# Altium PCB SIM7020.PcbDoc (part 3 of 3)
Units mm, origin at the board's own origin, x right, y up, seen from the top; angles counter-clockwise.
Board outline 43.87 x 60.4 mm, 2 copper layers (Top Layer, Bottom Layer); 78 components, 60 nets, 252 pads, 354 vias.
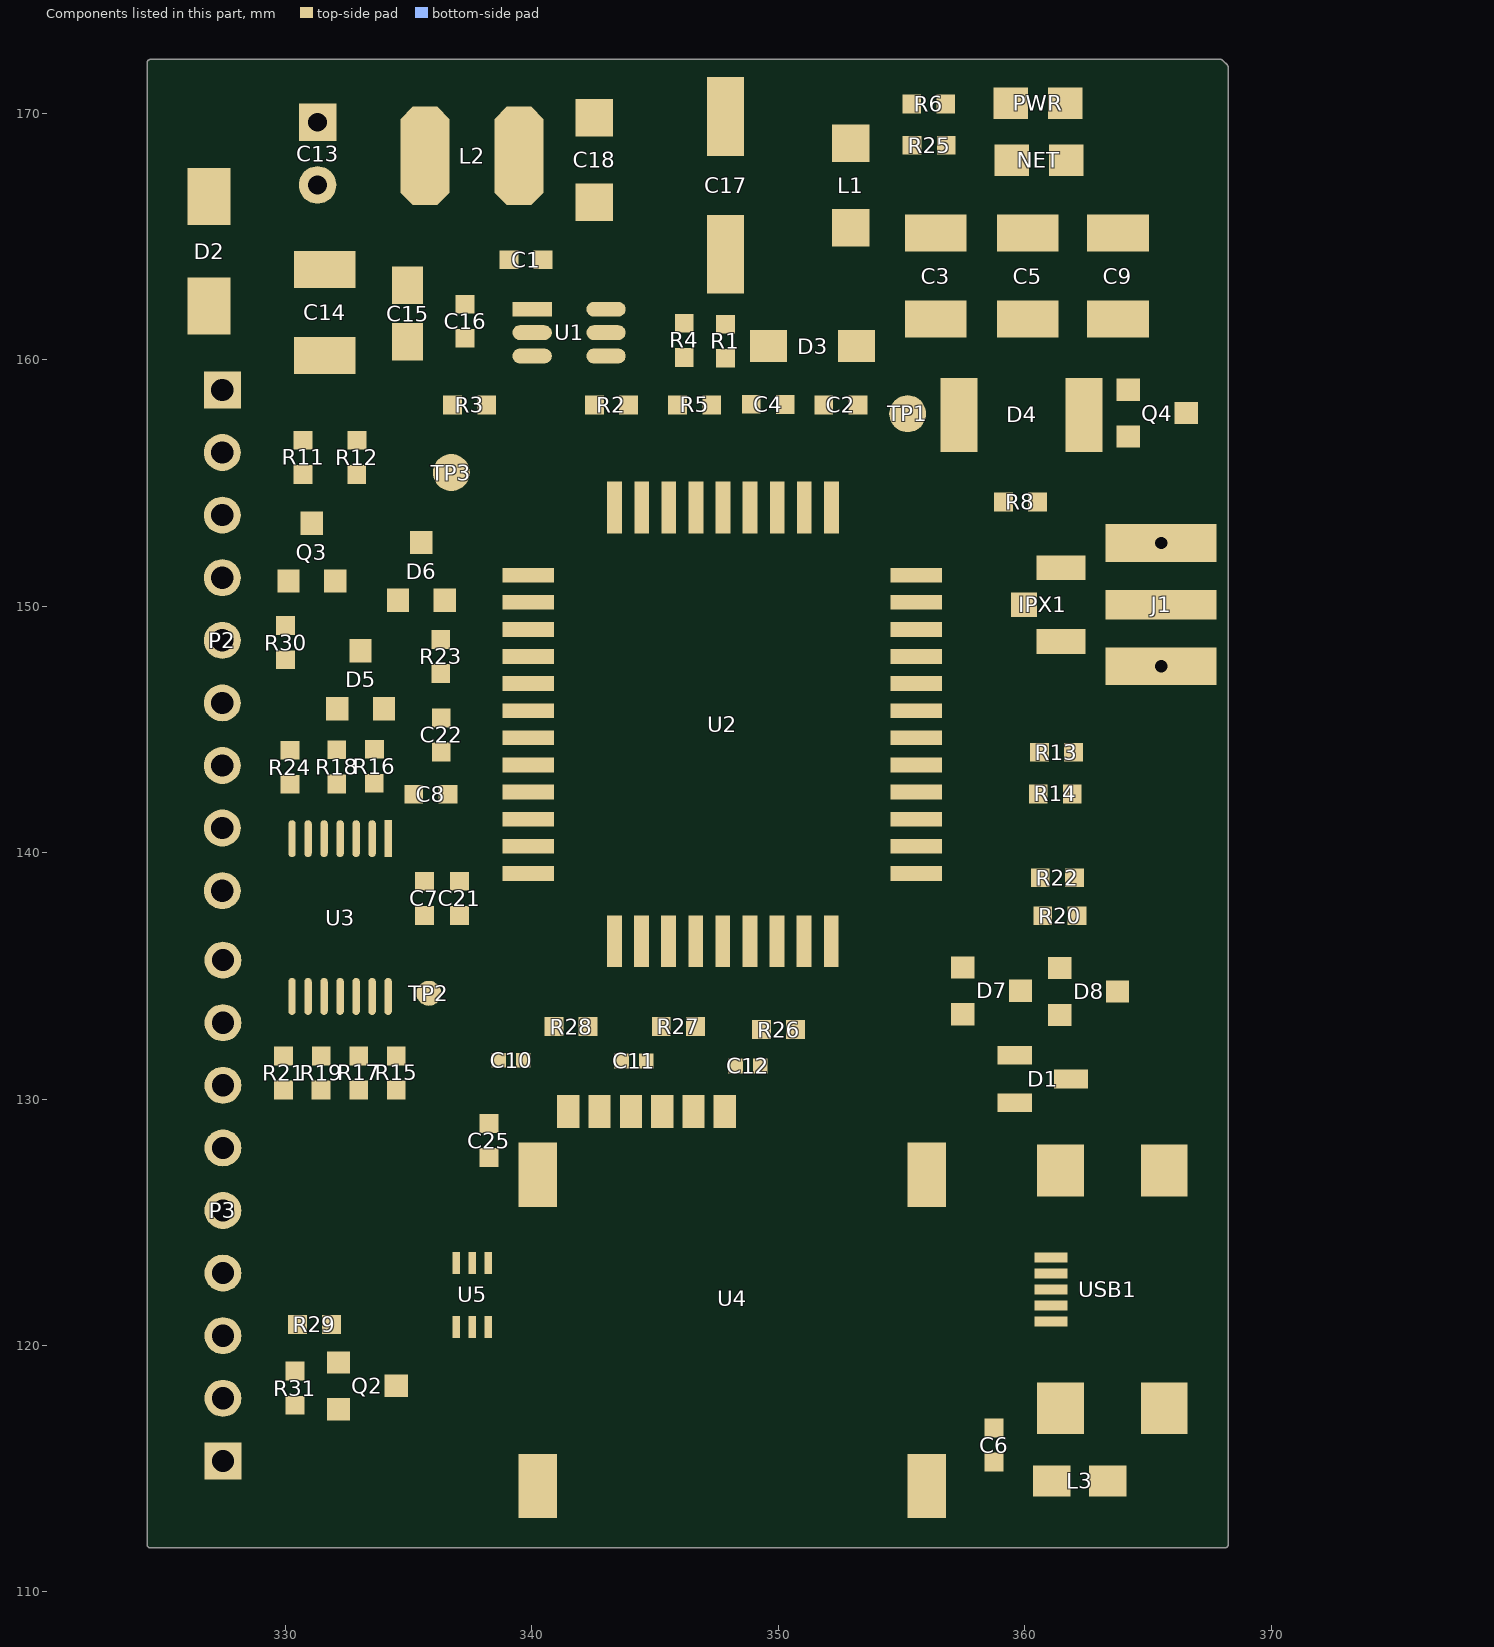
[diagram p3: the components of this part, seen from the top]

## Silkscreen, mask and mechanical layers (free items; w line width, h text height)
Top Overlay:
  lines w0.254: 321.716,172.11 324.104,172.11 ; 321.818,111.862 324.206,111.862 ; 322.075,113.386 322.58,111.862 ; 322.171,170.587 322.682,172.11 ; 322.326,111.862 322.834,111.861 ; 322.428,172.111 322.936,172.11 ; 322.615,132.439 322.58,111.862 ; 322.647,151.533 322.682,172.11 ; 323.091,113.385 322.58,111.862 ; 323.187,170.586 322.682,172.11 ; 324.46,110.134 324.46,111.608 ; 324.46,110.541 324.459,111.049 ; 325.982,111.306 324.46,110.795 ; 325.985,110.29 324.46,110.795 ; 336.883,110.824 324.46,110.795 ; 343.357,143.51 343.357,144.882 ; 355.724,110.868 368.148,110.896 ; 366.622,111.401 368.148,110.896 ; 366.625,110.385 368.148,110.896 ; 368.148,110.642 368.147,111.15
  text "VIN" at 325.882,158.648 h0.74 r90
  text "EN" at 325.882,156.566 h0.74 r90
  text "VEXT" at 325.933,153.264 h0.74 r90
  text "PKEY" at 325.933,150.063 h0.74 r90
  text "ADC" at 325.831,147.472 h0.74 r90
  text "P1" at 325.831,145.796 h0.74 r90
  text "RST" at 325.831,142.697 h0.74 r90
  text "DRT1" at 325.831,139.7 h0.74 r90
  text "P0" at 325.831,137.77 h0.74 r90
  text "RP0" at 325.831,134.874 h0.74 r90
  text "60.24889 (mm)" at 323.529,132.691 h1.52 r89.9
  text "EINT" at 325.831,131.826 h0.74 r90
  text "RX2" at 325.882,129.286 h0.74 r90
  text "TX2" at 325.933,126.848 h0.74 r90
  text "RX1" at 325.882,124.714 h0.74 r90
  text "TX1" at 325.933,121.666 h0.74 r90
  text "RI" at 325.933,119.837 h0.74 r90
  text "GND" at 325.882,116.738 h0.74 r90
  text "GND" at 325.933,114.249 h0.74 r90
  text "ALIENTEK" at 329.235,114.097 h1.4
  text "43.68812 (mm)" at 337.139,109.91 h1.52 r0.13

## Text inside footprints (layer, text, board x,y; h text height)
U2: Top Overlay "G" at 352.323,149.936 h0.75; Top Overlay "B" at 350.749,139.573 h0.75 r270